# Altium PCB MiniSCT-LB.PcbDoc
Units mm, origin at the board's own origin, x right, y up, seen from the top; angles counter-clockwise.
Board outline 340 x 220 mm, 6 copper layers (Top Layer, Int1 (GND), Int2 (Sign), Int3 (Sign), Int4 (P5V0R), Bottom Layer), stack 1.551 mm thick; 29 components, 49 nets, 113 pads, 0 vias.
Unrouted connection lines stored in the file: 14.
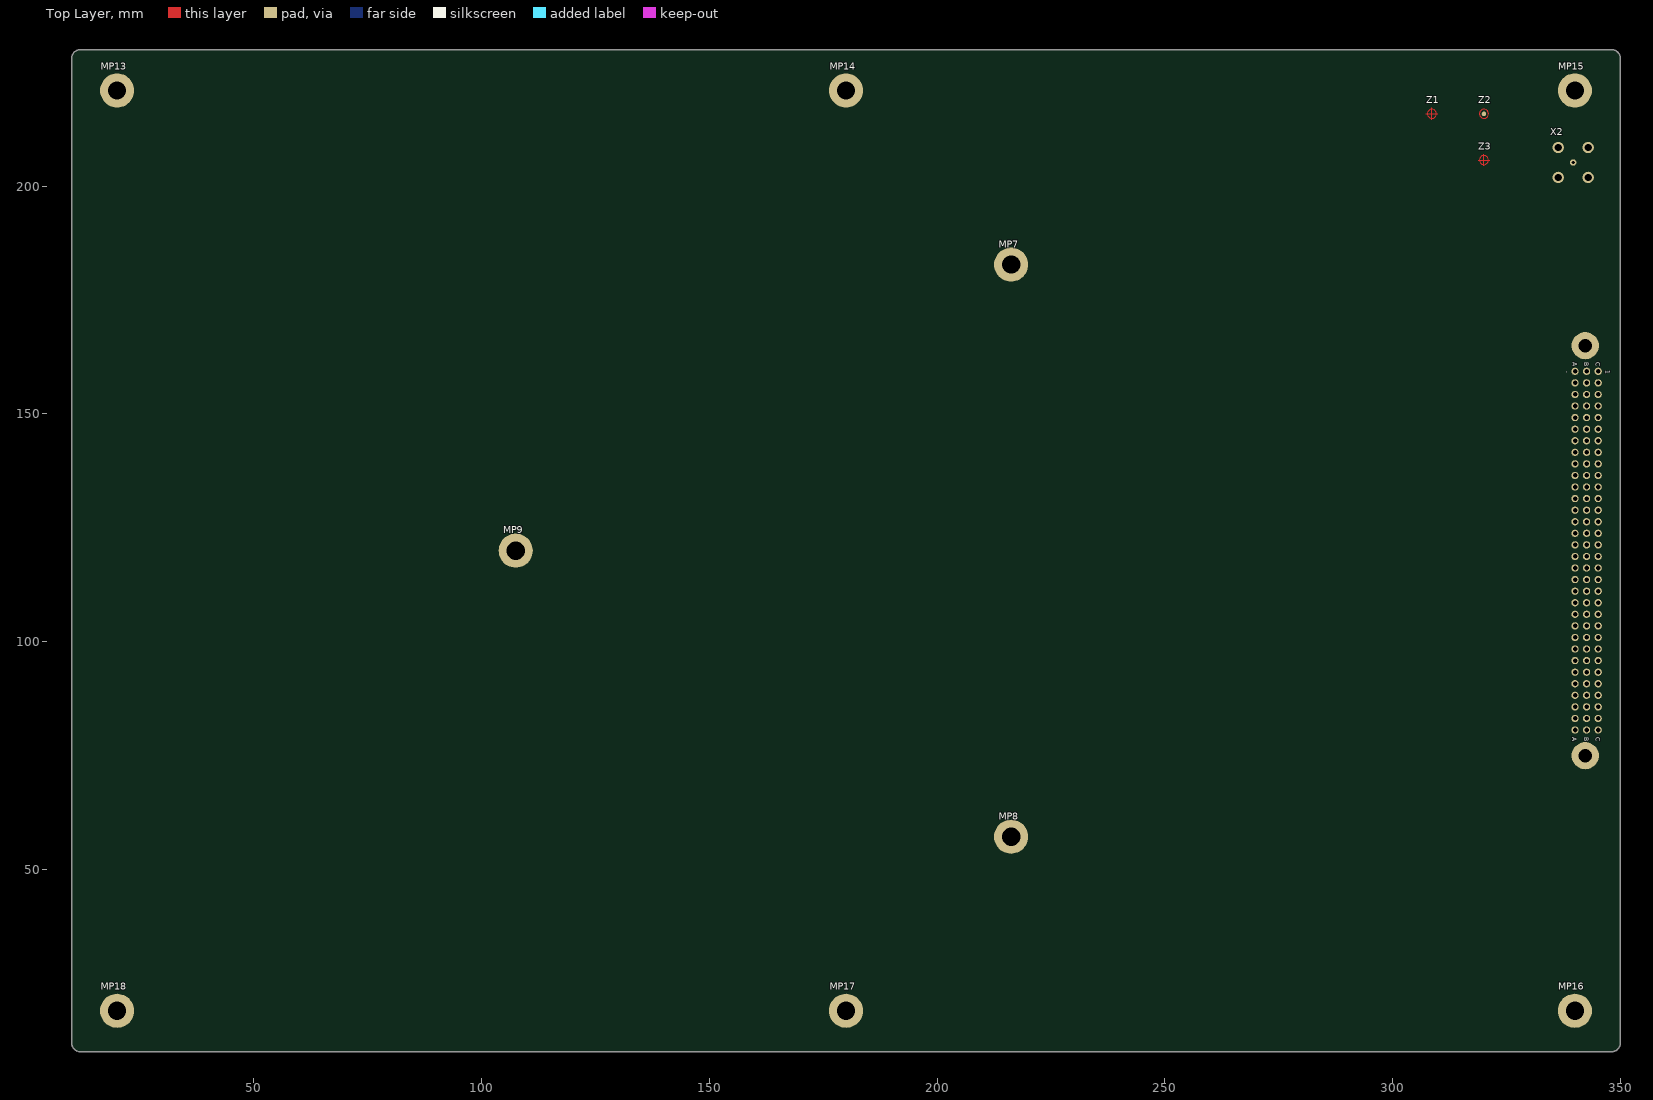
[diagram p0: Top Layer view]
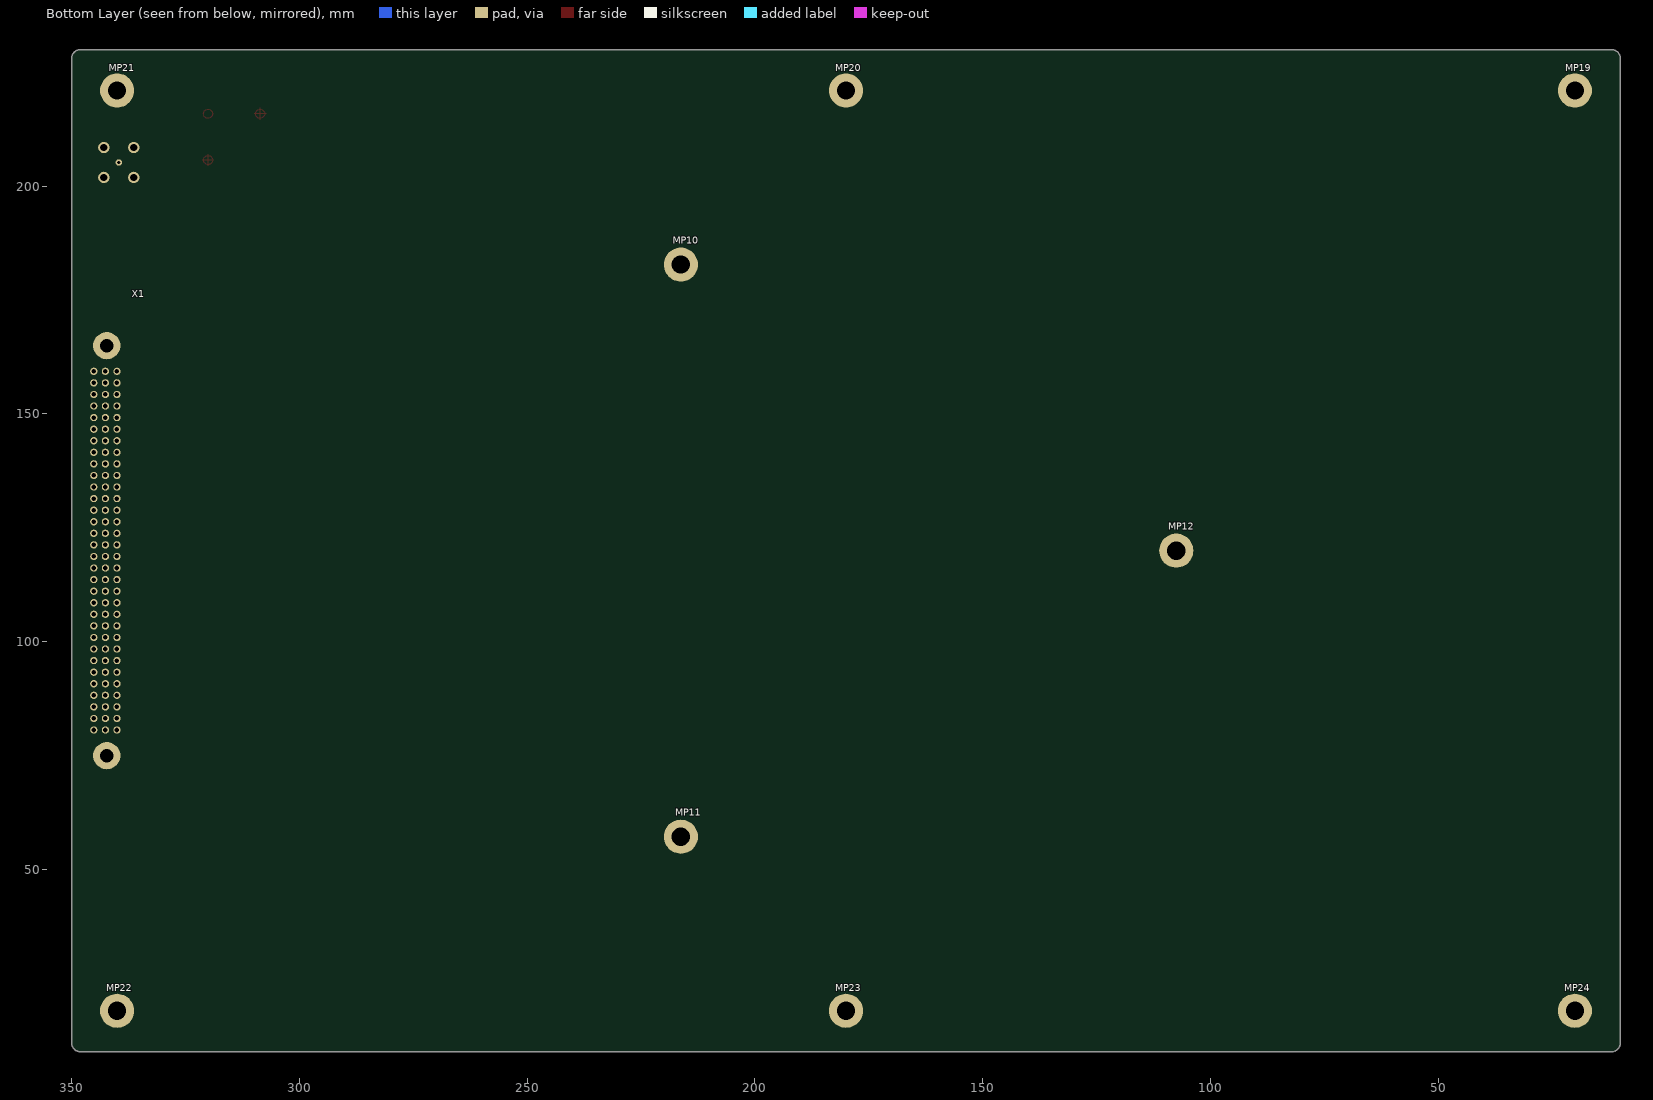
[diagram p1: Bottom Layer view, seen from below]
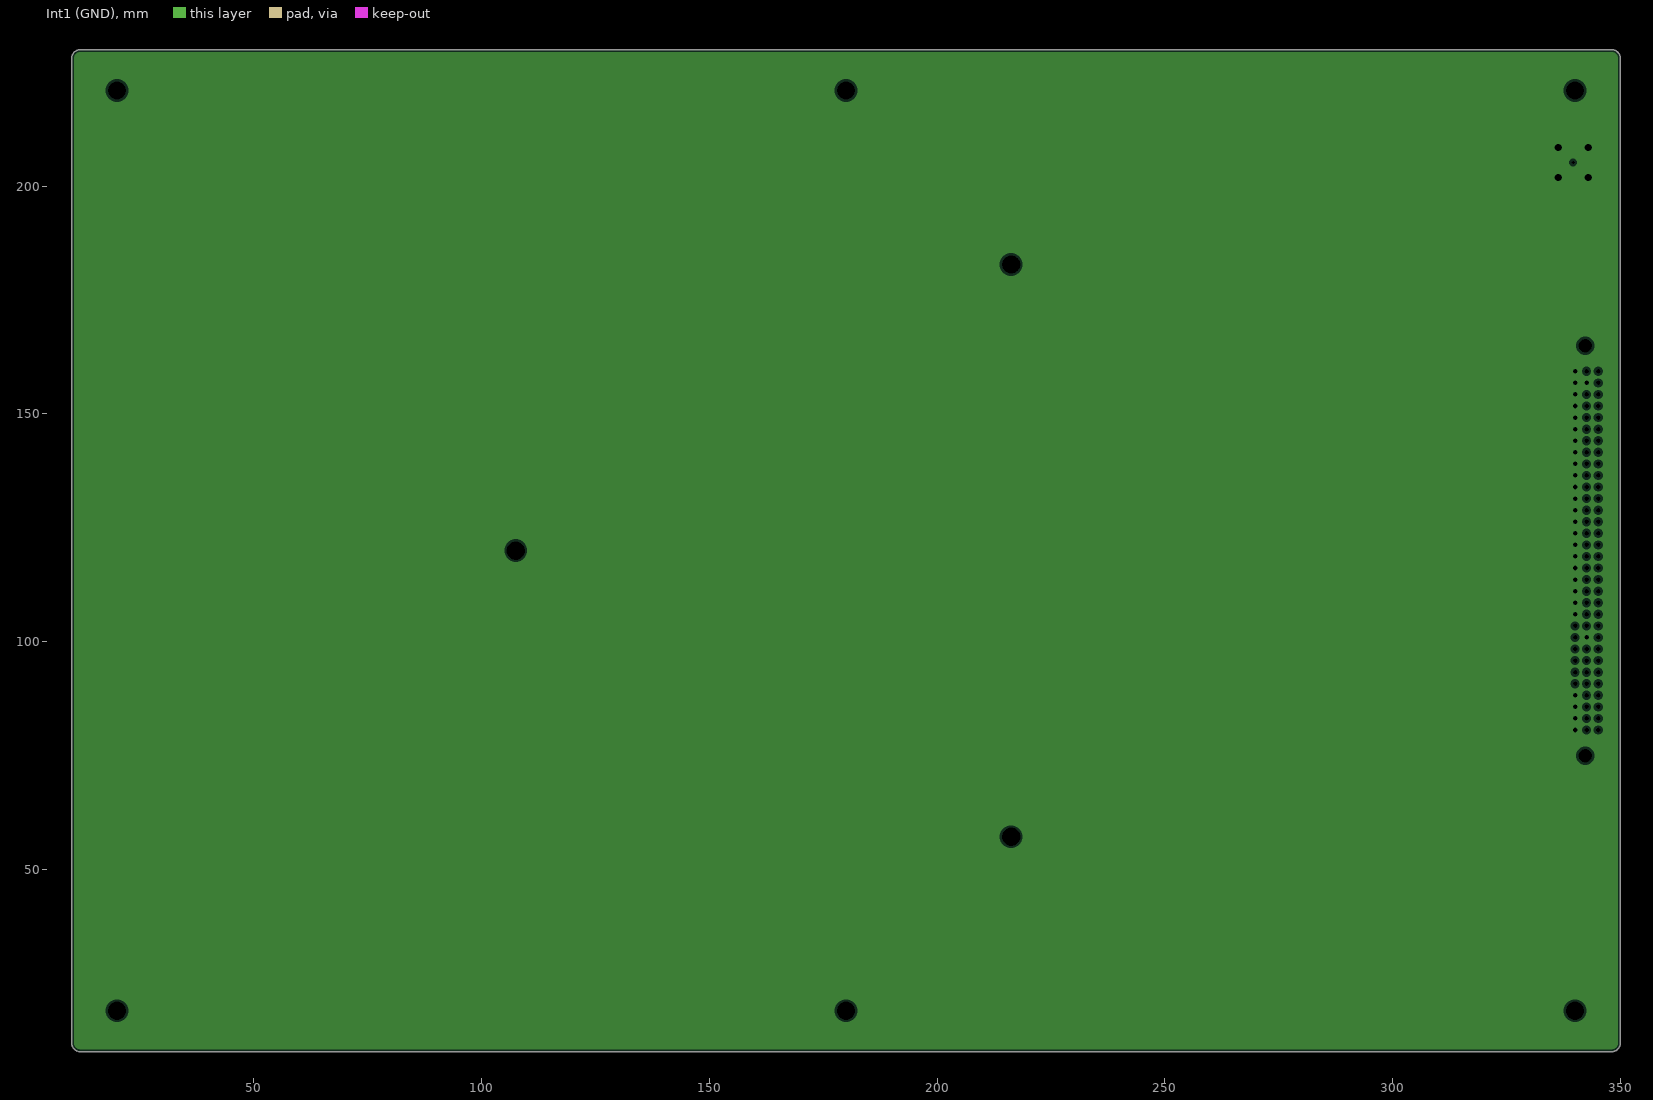
[diagram p2: Int1 (GND), clearances drawn from the general rule]
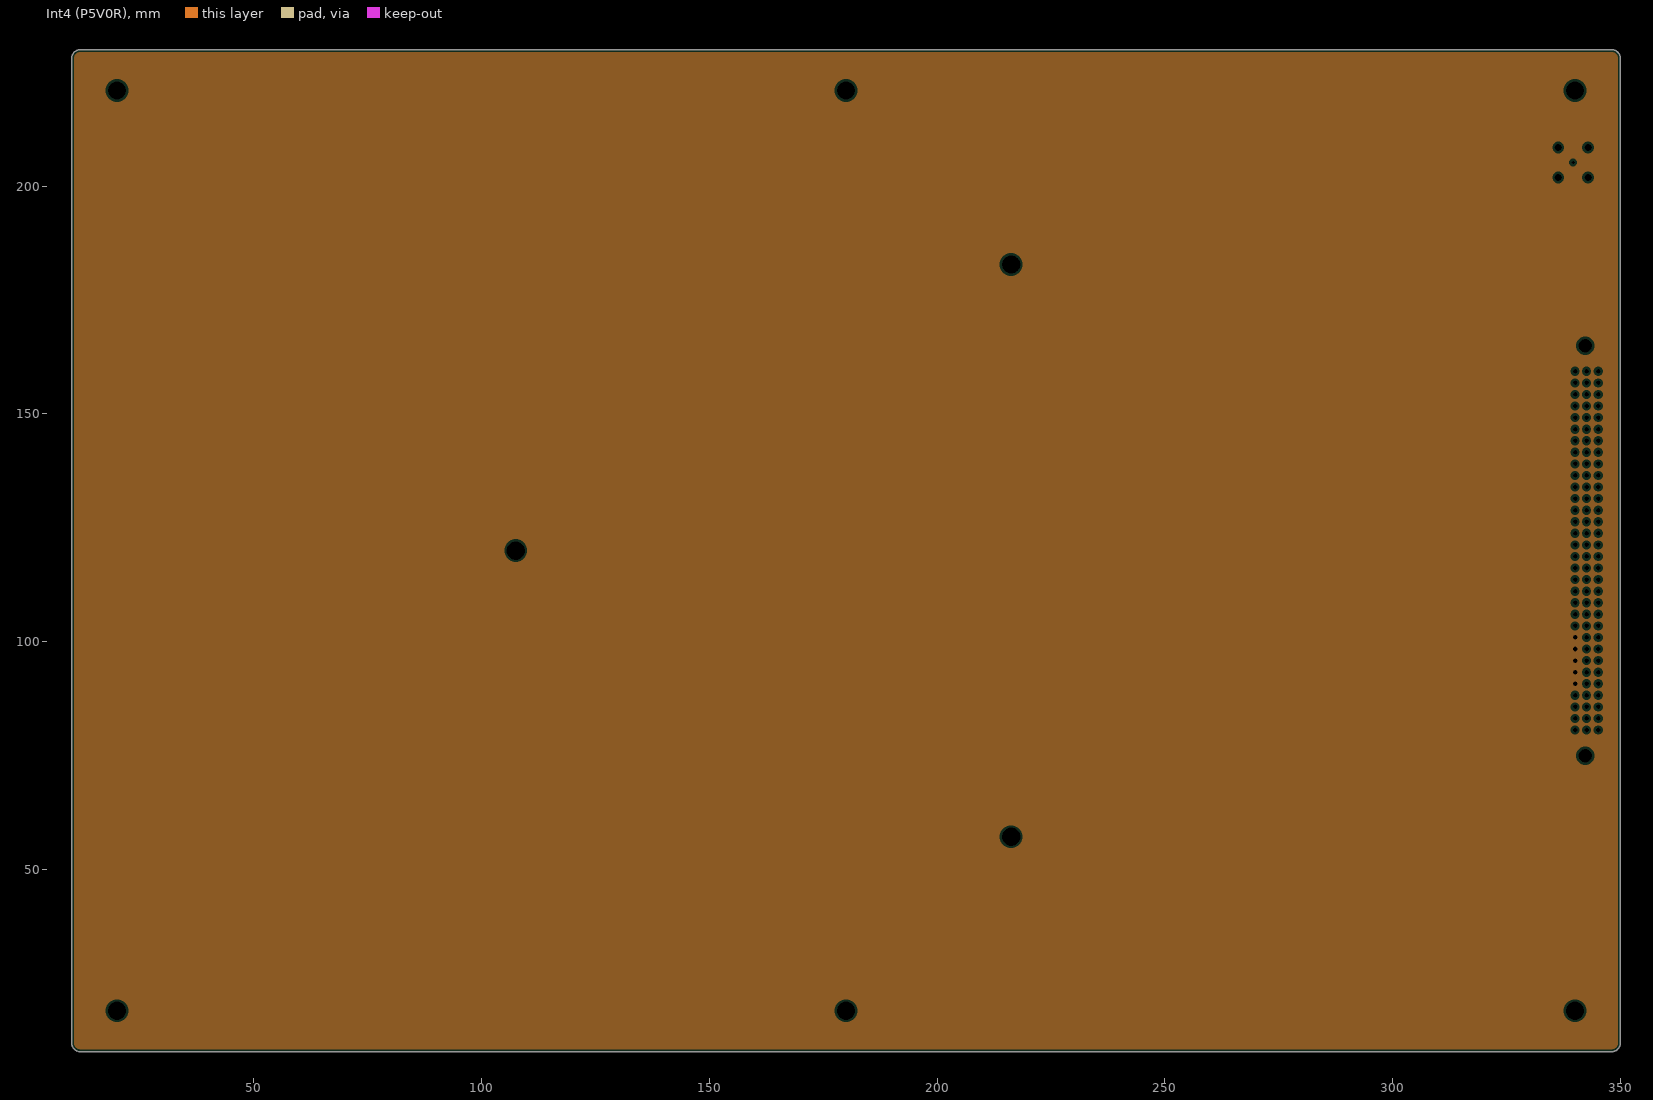
[diagram p3: Int4 (P5V0R), clearances drawn from the general rule]

## Layer stack, top to bottom
Top Solder: solder mask 0.0254, SM-001, Dk 4
Top Layer: signal copper 0.035
Dielectric 1: prepreg 0.0711, PP-006, Dk 4.1
Dielectric 2: prepreg 0.0711, PP-006, Dk 4.1
Int1 (GND): plane copper 0.035, net GND
Dielectric 3: core 0.4572, Core-035, Dk 4.7
Int2 (Sign): signal copper 0.035
Dielectric 4: prepreg 0.0711, PP-006, Dk 4.1
Dielectric 5: prepreg 0.0711, PP-006, Dk 4.1
Int3 (Sign): signal copper 0.035
Dielectric 6: core 0.4572, Core-035, Dk 4.7
Int4 (P5V0R): plane copper 0.035, net P5V0R
Dielectric 7: prepreg 0.0711, PP-006, Dk 4.1
Dielectric 8: prepreg 0.0711, PP-006, Dk 4.1
Bottom Layer: signal copper 0.035
Bottom Solder: solder mask 0.0254, SM-001, Dk 4

## Board outline
12,10 cw(c12,12) 10,12 10,228 cw(c12,228) 12,230 348,230 cw(c348,228) 350,228 350,12 cw(c348,12) 348,10

## Design rules (kind name [scope] priority, off if disabled: settings)
Clearance [All] p1: gap=0.254 ignorepadtopadclearanceinfootprint=FALSE except(0: Arc-Hole Track-Hole SMDPad-Hole THPad-Hole Via-Hole Fill-Hole Poly-Hole Region-Hole Text-Hole)
PlaneClearance [All] p1: clearance=0.508
PlaneConnect [All] p1: planeconnectstyle=Relief reliefexpansion=0.508 reliefentries=4 reliefconductorwidth=0.254 reliefairgap=0.254
PolygonConnect [All] p1: connectstyle=Relief reliefconductorwidth=0.254 reliefentries=4 polygonreliefangle="90 Angle" airgapwidth=0.254
RoomDefinition MiniSCT-LB [InComponentClass('MiniSCT-LB')] p1: confinementstyle=ConfineIn formatcopy=TRUE lockcomponents=FALSE outline 10.16,10.16 350.52,10.16 350.52,229.87 10.16,229.87
RoutingVias [All] p1: holewidth=0.711 width=1.27 viastyle="Through Hole" minholewidth=0.711 minwidth=1.27 maxholewidth=0.711 maxwidth=1.27
SolderMaskExpansion [All] p1: expansion=0.102 istentingtop=FALSE
Width [All] p1: maxlimit=0.254 minlimit=0.254 preferedwidth=0.254
28 further rules are at their usual default settings.

## Components (designator, comment, footprint, x,y, rotation, side; value= is the part's Value field where it differs from the comment)
MP1 "DIN41612 Spacer MiniSCT LB" "DIN41612 Spacer MiniSCT LB" 374.65,129.54 r90 bottom
MP2 "ISO1207 - M2.5x16" "ISO1207 M2.5x16" 379.73,104.14 r0 top
MP3 "ISO1207 - M2.5x16" "ISO1207 M2.5x16" 389.89,106.68 r0 top
MP4 "ISO4035 - M2.5" "ISO4035 - M2.5" 382.27,90.17 r0 top
MP5 "ISO4035 - M2.5" "ISO4035 - M2.5" 391.16,90.17 r0 top
MP6 "Thermostream Ring" "Thermo Stream Ring" 381,347.98 r0 top
MP7 "Thermostream Dowel" "Thermo Dowel" 216.25,182.787 r0 top locked
MP8 "Thermostream Dowel" "Thermo Dowel" 216.25,57.213 r0 top locked
MP9 "Thermostream Dowel" "Thermo Dowel" 107.5,120 r0 top locked
MP10 "ISO1207 - M4x10" "ISO1207 M4x10" 216.25,182.787 r180 bottom locked
MP11 "ISO1207 - M4x10" "ISO1207 M4x10" 216.25,57.213 r180 bottom locked
MP12 "ISO1207 - M4x10" "ISO1207 M4x10" 107.5,120 r180 bottom locked
MP13 "ISO1207 - M4x10" "ISO1207 M4x10" 20,221 r0 top locked
MP14 "ISO1207 - M4x10" "ISO1207 M4x10" 180,221 r0 top locked
MP15 "ISO1207 - M4x10" "ISO1207 M4x10" 340,221 r0 top locked
MP16 "ISO1207 - M4x10" "ISO1207 M4x10" 340,19 r0 top locked
MP17 "ISO1207 - M4x10" "ISO1207 M4x10" 180,19 r0 top locked
MP18 "ISO1207 - M4x10" "ISO1207 M4x10" 20,19 r0 top locked
MP19 "MiniSCT LB StandOff" "MiniSCT LB StandOff" 20,221 r180 bottom locked
MP20 "MiniSCT LB StandOff" "MiniSCT LB StandOff" 180,221 r180 bottom locked
MP21 "MiniSCT LB StandOff" "MiniSCT LB StandOff" 340,221 r180 bottom locked
MP22 "MiniSCT LB StandOff" "MiniSCT LB StandOff" 340,19 r180 bottom locked
MP23 "MiniSCT LB StandOff" "MiniSCT LB StandOff" 180,19 r180 bottom locked
MP24 "MiniSCT LB StandOff" "MiniSCT LB StandOff" 20,19 r180 bottom locked
X1 "09731966907" 09731966907 342.27,120 r270 bottom
X2 "112778" 112778 339.62,205.21 r180 top
Z1 "Fiducial" "Fiducial Cross" 308.61,215.9 r0 top
Z2 "Fiducial" "Fiducial Point" 320.04,215.9 r0 top
Z3 "Fiducial" "Fiducial Cross" 320.04,205.74 r0 top

## Footprints (in the part's own frame and the unit in brackets; to place one, negate y for a bottom-side part, rotate by r counter-clockwise, add the part's x,y. Pads: shape width x height; smd on the part's side, far side on the other; paste and mask are expansions set on the pad)
112778 [mm] "BNC"
  round 2.5 hole 1.6 unplated: 0(-3.28,3.28) 0(-3.28,-3.28) 0(3.28,3.28) 0(3.28,-3.28)
  round 1.4 hole 0.75 unplated: 1(0,0)
  body extent -22.63,-5.26 5.26,5.26, height 11.74
09731966907 [mm] "CONN DIN HDR 96POS Male"
  round 6 hole 3 paste-3 mask+0.1: 1(-45,0) 1(45,0)
  round 1.6 hole 1: A1(-39.37,2.24) A2(-36.83,2.24) A3(-34.29,2.24) A4(-31.75,2.24) A5(-29.21,2.24) A6(-26.67,2.24) A7(-24.13,2.24) A8(-21.59,2.24) A9(-19.05,2.24) A10(-16.51,2.24) A11(-13.97,2.24) A12(-11.43,2.24) A13(-8.89,2.24) A14(-6.35,2.24) A15(-3.81,2.24) A16(-1.27,2.24) A17(1.27,2.24) A18(3.81,2.24) A19(6.35,2.24) A20(8.89,2.24) A21(11.43,2.24) A22(13.97,2.24) A23(16.51,2.24) A24(19.05,2.24) A25(21.59,2.24) A26(24.13,2.24) A27(26.67,2.24) A28(29.21,2.24) A29(31.75,2.24) A30(34.29,2.24) A31(36.83,2.24) A32(39.37,2.24) B1(-39.37,-0.3) B2(-36.83,-0.3) B3(-34.29,-0.3) B4(-31.75,-0.3) B5(-29.21,-0.3) B6(-26.67,-0.3) B7(-24.13,-0.3) B8(-21.59,-0.3) B9(-19.05,-0.3) B10(-16.51,-0.3) B11(-13.97,-0.3) B12(-11.43,-0.3) B13(-8.89,-0.3) B14(-6.35,-0.3) B15(-3.81,-0.3) B16(-1.27,-0.3) B17(1.27,-0.3) B18(3.81,-0.3) B19(6.35,-0.3) B20(8.89,-0.3) B21(11.43,-0.3) B22(13.97,-0.3) B23(16.51,-0.3) B24(19.05,-0.3) B25(21.59,-0.3) B26(24.13,-0.3) B27(26.67,-0.3) B28(29.21,-0.3) B29(31.75,-0.3) B30(34.29,-0.3) B31(36.83,-0.3) B32(39.37,-0.3) C1(-39.37,-2.84) C2(-36.83,-2.84) C3(-34.29,-2.84) C4(-31.75,-2.84) C5(-29.21,-2.84) C6(-26.67,-2.84) C7(-24.13,-2.84) C8(-21.59,-2.84) C9(-19.05,-2.84) C10(-16.51,-2.84) C11(-13.97,-2.84) C12(-11.43,-2.84) C13(-8.89,-2.84) C14(-6.35,-2.84) C15(-3.81,-2.84) C16(-1.27,-2.84) C17(1.27,-2.84) C18(3.81,-2.84) C19(6.35,-2.84) C20(8.89,-2.84) C21(11.43,-2.84) C22(13.97,-2.84) C23(16.51,-2.84) C24(19.05,-2.84) C25(21.59,-2.84) C26(24.13,-2.84) C27(26.67,-2.84) C28(29.21,-2.84) C29(31.75,-2.84) C30(34.29,-2.84) C31(36.83,-2.84) C32(39.37,-2.84)
  body extent -47.5,-5.85 47.5,5.25, height 21.6
"DIN41612 Spacer MiniSCT LB" [mm]
  body extent -47.5,-4.37 47.5,4.38, height 10
"Fiducial Cross" [mm]
  Top Layer circle w0.15: c0,0 r1
  Top Layer lines w0.15: -1.3,0 1.3,0 ; 0,-1.3 0,1.3
"Fiducial Point" [mm]
  round 1 smd paste+0 mask+0: 0(0,0)
  Top Layer circle w0.15: c0,0 r1
"ISO1207 M2.5x16" [mm] "SlottedCheese Head Screw M2.5x16"
  body extent -2.25,-2.25 2.25,2.25, height 1.8
"ISO1207 M4x10" [mm] "SlottedCheese Head Screw M4x10"
  round 7.5 hole 4 unplated: 0(0,0)
  body extent -3.5,-3.5 3.5,3.5, height 2.6
"ISO4035 - M2.5" [mm]
  body extent -2.5,-2.89 2.5,2.89, height 14.4
"MiniSCT LB StandOff" [mm]
  body extent -3.5,-3.5 3.5,3.5, height 26.9
"Thermo Dowel" [mm]
  body extent -3,-3 3,3, height 11.5
"Thermo Stream Ring" [mm]
  body extent -77.5,-77.5 77.5,77.5, height 15

## Part data
MP1: "DIN41612 Spacer LoadBoard side of a MiniSCT"
MP2 MP3: "Slotted Cheese Head Screw M2.5x16"
MP4 MP5: "Hex Thin Nut Chamfered grade AB M2.5"
MP10 MP11 MP12 MP13 MP14 MP15 MP16 MP17 MP18: "Slotted Cheese Head Screw M4x10"
MP19 MP20 MP21 MP22 MP23 MP24: "MiniSCT LoadBoard StandOff"
X1: library part MiniSCT8, "96 Position Din Connector Header, Male Pins Gold or Gold-Palladium Through Hole", Manufacturer=Harting, Supplier Part Number 1=1195-5217-ND, ComponentLink1Description=Datasheet, ComponentLink1URL=https://b2b.harting.com/files/download/PRD/PDF_DS/09731100001_100560208DRW001D.pdf, ComponentLink2Description=Reference, ComponentLink2URL=https://www.digikey.de/products/en?keywords=09731966907, Manufacturer Part Number=09731966907, Supplier 1=Digi-Key
X2: library part CON_TH_2_F_90_BNC, "CONN BNC JACK R/A 75 OHM PCB", Manufacturer="Amphenol RF", Supplier Part Number 1=ACX1985-ND, ComponentLink1Description=DataSheet, ComponentLink1URL=https://s3-us-west-2.amazonaws.com/catsy.582/112778.pdf, ComponentLink2Description=Reference, ComponentLink2URL=https://www.digikey.de/product-detail/en/amphenol-rf/112778/ACX1985-ND/3088370, Manufacturer Part Number=112778, Supplier 1=Digi-Key
Z1 Z2 Z3: "Assembly AOI"

## Nets (pads, with @x,y where several pads share a name; then routed paths per layer and width w, separated by ;. In a path a pad name is that pad's centre, name@x,y a point inside that pad or via, vN(x,y) a via of type N, cw(c..) or ccw(c..) an arc to the next point about the centre after c; other vN are vias at no path point)
ABUS0F: X1.C13
ABUS0S: X1.B13
ABUS1F: X1.C14
ABUS1S: X1.B14
CAP_DIS: X1.C24
CBIT0: X1.C25
CBIT1: X1.C26
CBIT2: X1.C27
CBIT3: X1.C28
CBIT4: X1.C29
CBIT5: X1.C30
CBIT6: X1.C31
CBIT7: X1.C32
CBIT8: X1.B25
CBIT9: X1.B26
CBIT10: X1.B27
CBIT11: X1.B28
CBIT12: X1.B29
CBIT13: X1.B30
CBIT14: X1.B31
CBIT15: X1.B32
CH0F: X1.C4
CH0S: X1.B4
CH1F: X1.C5
CH1S: X1.B5
CH2F: X1.C6
CH2S: X1.B6
CH3F: X1.C7
CH3S: X1.B7
CH4F: X1.C8
CH4S: X1.B8
CH5F: X1.C9
CH5S: X1.B9
CH6F: X1.C10
CH6S: X1.B10
CH7F: X1.C11
CH7S: X1.B11
COIL+: X1.B23
COIL-: X1.A23
DPSF: X1.C12
DPSS: X1.B12
GBUSF: X1.C15
GBUSS: X1.B15
GND: X1.A1 X1.A2 X1.A3 X1.A4 X1.A5 X1.A6 X1.A7 X1.A8 X1.A9 X1.A10 X1.A11 X1.A12 X1.A13 X1.A14 X1.A15 X1.A16 X1.A17 X1.A18 X1.A19 X1.A20 X1.A21 X1.A22 X1.A29 X1.A30 X1.A31 X1.A32 X1.B2 X1.B24 X2.0
NetX1_B1: X1.B1 X2.1
P5V0R: X1.A24 X1.A25 X1.A26 X1.A27 X1.A28
PD0: X1.C1
PD1: X1.C2
PVLB: X1.B16 X1.B17 X1.B18 X1.B19 X1.B20 X1.B21 X1.B22 X1.C16 X1.C17 X1.C18 X1.C19 X1.C20 X1.C21 X1.C22
pads on no net: MP10.0 MP11.0 MP12.0 MP13.0 MP14.0 MP15.0 MP16.0 MP17.0 MP18.0 X1.1 X1.B3 X1.C3 X1.C23 Z2.0

## Polygon pours and split planes (outlines as drawn)
GND on Int1 (GND) (split plane): 348.167,229.482 348.332,229.454 348.493,229.408 348.647,229.344 348.794,229.263 348.93,229.166 349.055,229.055 349.166,228.93 349.263,228.794 349.344,228.647 349.408,228.493 349.454,228.332 349.482,228.167 349.491,228.015 349.49,228 349.49,12 349.491,11.985 349.482,11.833 349.454,11.668 349.408,11.507 349.344,11.353 349.263,11.206 349.166,11.07 349.055,10.945 348.93,10.834 348.794,10.737 348.647,10.656 348.493,10.592 348.332,10.546 348.167,10.518 348.015,10.509 348,10.51 12,10.51 11.985,10.509 11.833,10.518 11.668,10.546 11.507,10.592 11.353,10.656 11.206,10.737 11.07,10.834 10.945,10.945 10.834,11.07 10.737,11.206 10.656,11.353 10.592,11.507 10.546,11.668 10.518,11.833 10.509,11.985 10.51,12 10.51,228 10.509,228.015 10.518,228.167 10.546,228.332 10.592,228.493 10.656,228.647 10.737,228.794 10.834,228.93 10.945,229.055 11.07,229.166 11.206,229.263 11.353,229.344 11.507,229.408 11.668,229.454 11.833,229.482 11.985,229.491 12,229.49 348,229.49 348.015,229.491
P5V0R on Int4 (P5V0R) (split plane): 348.167,229.482 348.332,229.454 348.493,229.408 348.647,229.344 348.794,229.263 348.93,229.166 349.055,229.055 349.166,228.93 349.263,228.794 349.344,228.647 349.408,228.493 349.454,228.332 349.482,228.167 349.491,228.015 349.49,228 349.49,12 349.491,11.985 349.482,11.833 349.454,11.668 349.408,11.507 349.344,11.353 349.263,11.206 349.166,11.07 349.055,10.945 348.93,10.834 348.794,10.737 348.647,10.656 348.493,10.592 348.332,10.546 348.167,10.518 348.015,10.509 348,10.51 12,10.51 11.985,10.509 11.833,10.518 11.668,10.546 11.507,10.592 11.353,10.656 11.206,10.737 11.07,10.834 10.945,10.945 10.834,11.07 10.737,11.206 10.656,11.353 10.592,11.507 10.546,11.668 10.518,11.833 10.509,11.985 10.51,12 10.51,228 10.509,228.015 10.518,228.167 10.546,228.332 10.592,228.493 10.656,228.647 10.737,228.794 10.834,228.93 10.945,229.055 11.07,229.166 11.206,229.263 11.353,229.344 11.507,229.408 11.668,229.454 11.833,229.482 11.985,229.491 12,229.49 348,229.49 348.015,229.491

## Silkscreen, mask and mechanical layers (free items; w line width, h text height)
Board Outline:
  the board outline again, w0.013
Board Cutout:
  circle w0.013: c342.27,75 r1.25
  circle w0.013: c180,221 r2
  circle w0.013: c180,19 r2
  circle w0.013: c342.27,165 r1.25
  circle w0.013: c107.5,120 r2
  circle w0.013: c340,221 r2
  circle w0.013: c340,19 r2
  circle w0.013: c216.25,57.213 r2
  circle w0.013: c20,221 r2
  circle w0.013: c20,19 r2
  circle w0.013: c216.25,182.787 r2

## Text inside footprints (layer, text, board x,y; h text height)
X1: Top Overlay "C" at 344.598,161.403 h1 r270; Top Overlay "B" at 342.058,161.403 h1 r270; Top Overlay "A" at 339.518,161.403 h1 r270; Top Overlay "C" at 344.544,79 h1 r270; Top Overlay "B" at 342.004,79 h1 r270; Top Overlay "A" at 339.464,79 h1 r270; Top Overlay "1" at 346.77,159.6 h1 r270